# Altium PCB PCB2.PcbDoc
Units mil, origin at the board's own origin, x right, y up, seen from the top; angles counter-clockwise.
Board outline 6000 x 4000 mil, 2 copper layers (Top Layer, Bottom Layer); 55 components, 41 nets, 167 pads, 6 vias.
Unrouted connection lines stored in the file: 66.
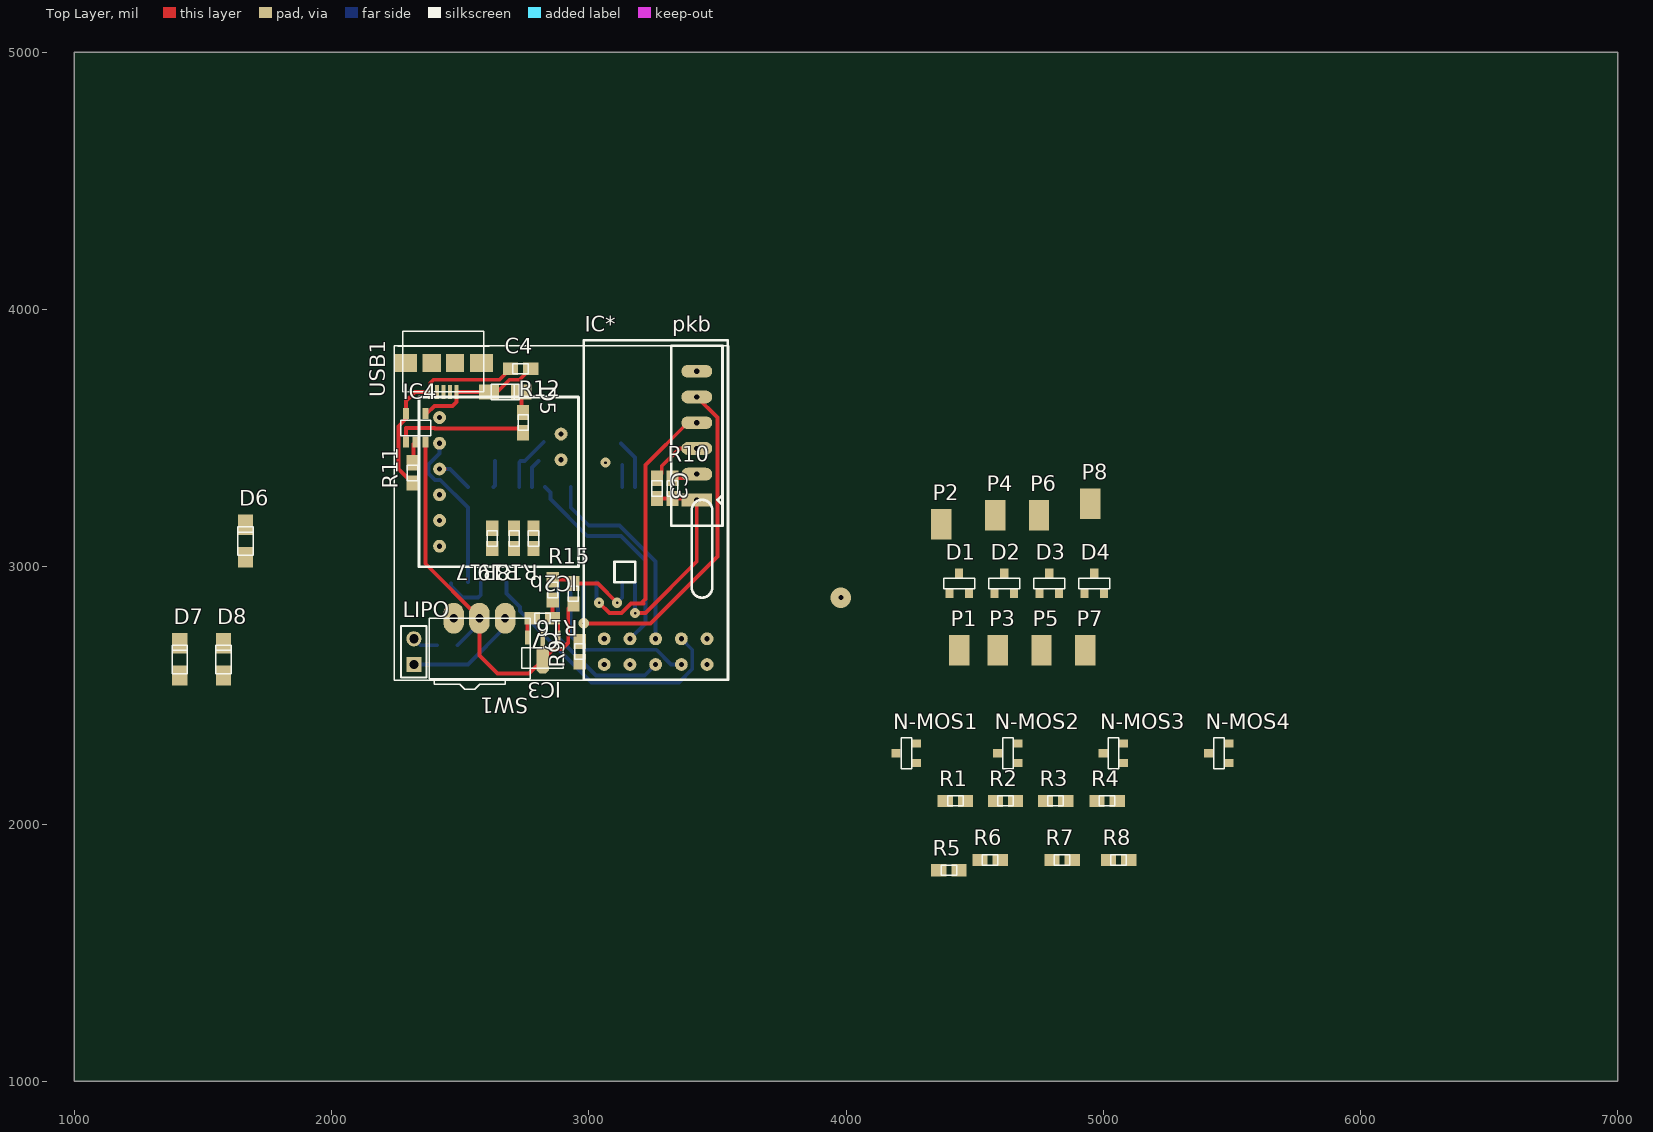
[diagram p0: Top Layer view]
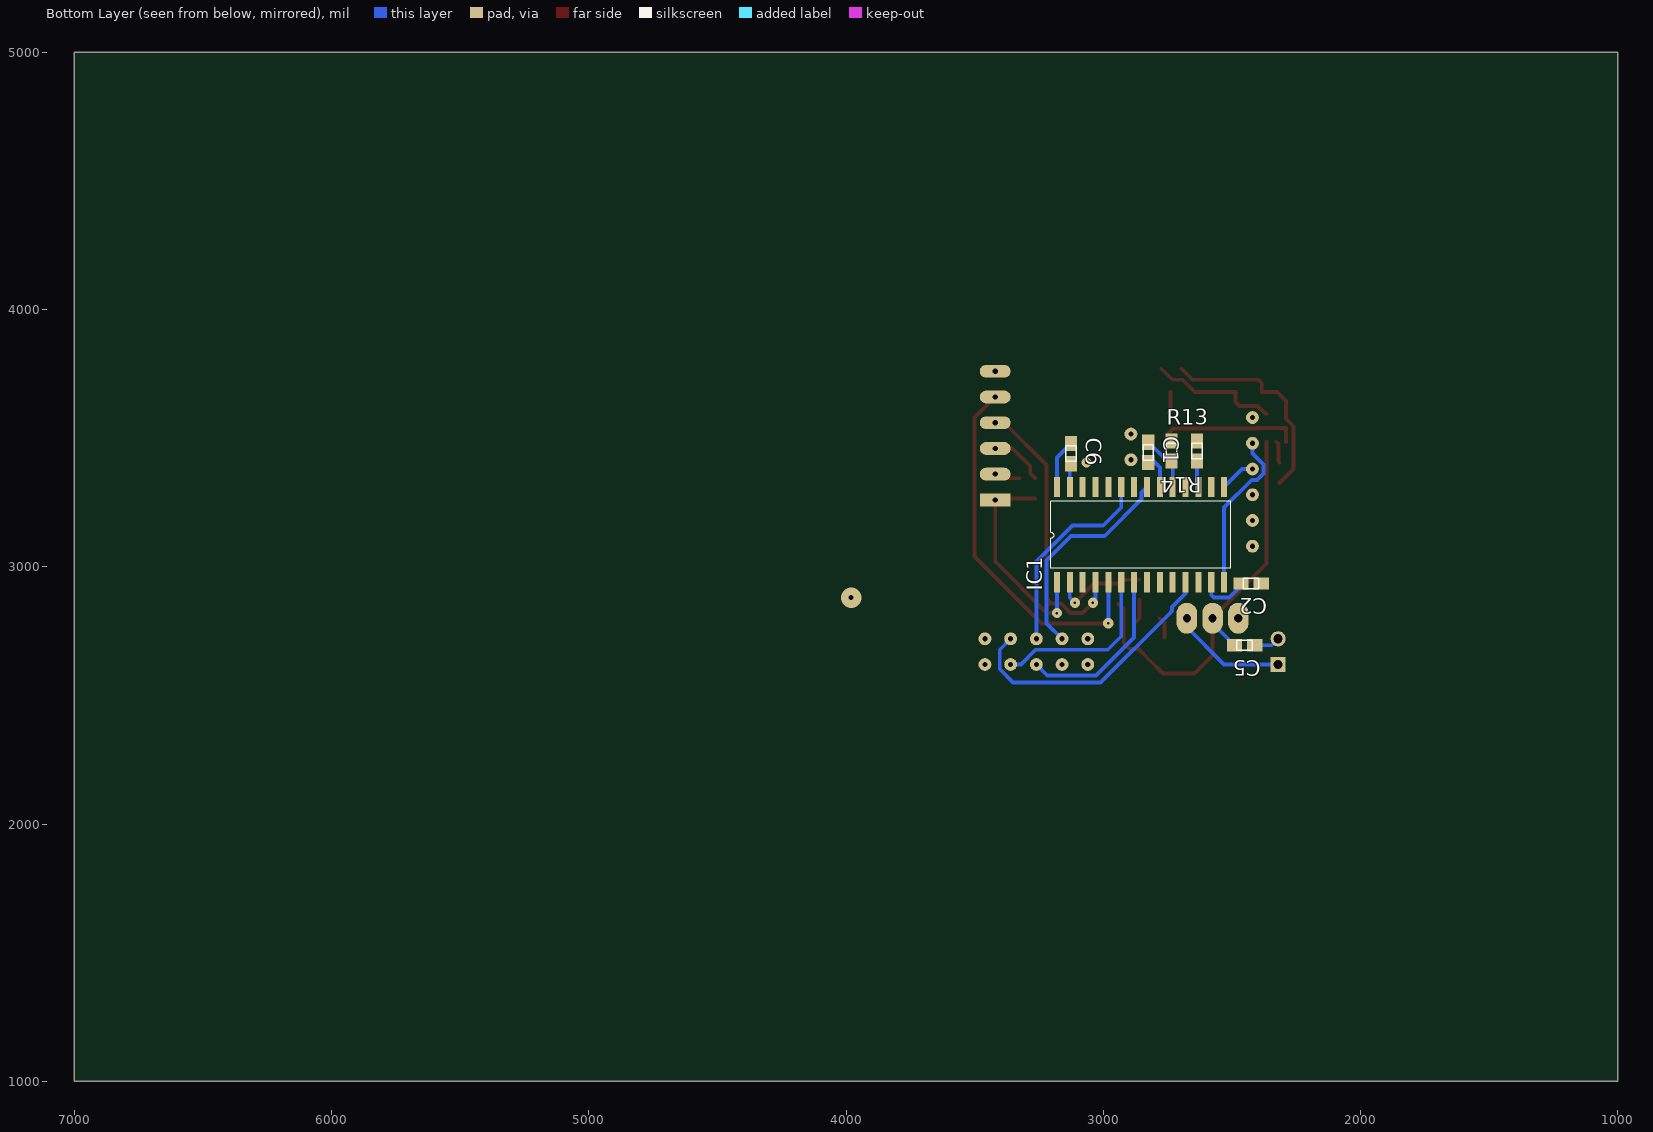
[diagram p1: Bottom Layer view, seen from below]

## Layer stack, top to bottom
Top Layer: signal copper 1.4
Dielectric: dielectric 12.6, FR-4, Dk 4.8
Bottom Layer: signal copper 1.4

## Board outline
1000,1000 7000,1000 7000,5000 1000,5000

## Design rules (kind name [scope] priority, off if disabled: settings)
Clearance [All] p1: gap=10
ComponentClearance [All] p1 off: gap=10 collisioncheckmode=3 verticalgap=10 showdistances=FALSE
PolygonConnect [All] p1: connectstyle=Relief reliefconductorwidth=10 reliefentries=4 polygonreliefangle="90 Angle"
RoutingVias [All] p1: holewidth=10 width=40 viastyle="Through Hole" minholewidth=10 minwidth=40 maxholewidth=10 maxwidth=40
SilkscreenOverComponentPads [All] p1: minsilkscreentomaskgap=10
SolderMaskExpansion [All] p1: expansion=4
Width [All] p1: maxlimit=15 minlimit=15 preferedwidth=15
26 further rules are at their usual default settings.

## Components (designator, comment, footprint, x,y, rotation, side; value= is the part's Value field where it differs from the comment)
C1 "TANTALE 10uf" cms805 2825,3445 r270 bottom
C2 "0.1uf ceramique" cms805 2425,2935 r0 bottom
C3 "1uf" cms805 3265,3305 r270 top
C4 "4.7uF" cms805 2735,3770 r0 top
C5 "4.7uF" cms805 2450,2695 r0 bottom
C6 "0.1uf ceramique" cms805 3125,3440 r270 bottom
C7 "1uF" cms805 2820,2800 r180 top
D1 "BAT54" SOT23 4440,2975 r0 top
D2 "BAT54" SOT23 4615,2975 r0 top
D3 "BAT54" SOT23 4790,2975 r0 top
D4 "BAT54" SOT23 4965,2975 r0 top
D5 "LED" cms1206 2675,3680 r0 top
D6 "LED" cms1206 1665,3100 r90 top
D7 "LED" cms1206 1410,2640 r90 top
D8 "LED" cms1206 1580,2640 r90 top
IC1 "dsPIC33FJ128MC802" SOIC28(300mil) 3180,2940 r90 bottom
IC2b "MPU6050" MPU6050_drotek 2420,3080 r180 top
IC3 "MCP1700" SOT89 2880,2725 r180 top
IC4 "MCP73831" SOT23-5 2330,3525 r0 top
IC* "NRF24L01" NRF24L01 3060,2620 r90 top
LIPO "Header 2" HDR1X2 2320,2620 r90 top
N-MOS1 "FD339" SOT23 4195,2275 r90 top
N-MOS2 "FD339" SOT23 4590,2275 r90 top
N-MOS3 "FD339" SOT23 5000,2275 r90 top
N-MOS4 "FD339" SOT23 5410,2275 r90 top
P1 "pad_moteur" PAD 4440,2675 r0 top
P2 "pad_moteur" PAD 4370,3165 r0 top
P3 "pad_moteur" PAD 4590,2675 r0 top
P4 "pad_moteur" PAD 4580,3200 r0 top
P5 "pad_moteur" PAD 4760,2675 r0 top
P6 "pad_moteur" PAD 4750,3200 r0 top
P7 "pad_moteur" PAD 4930,2675 r0 top
P8 "pad_moteur" PAD 4950,3245 r0 top
pkb "pickit3" pickit3 3420,3260 r90 top
R1 "10k" cms805 4425,2090 r0 top
R2 "10k" cms805 4620,2090 r0 top
R3 "10k" cms805 4815,2090 r0 top
R4 "10k" cms805 5015,2090 r0 top
R5 "330" cms805 4400,1820 r0 top
R6 "330" cms805 4560,1860 r0 top
R7 "330" cms805 4840,1860 r0 top
R8 "330" cms805 5060,1860 r0 top
R9 "10k" cms805 2965,2670 r90 top
R10 "10k" cms805 3325,3305 r90 top
R11 "4.7k" cms805 2315,3365 r90 top
R12 "150" cms805 2745,3560 r90 top
R13 "10k" cms805 2735,3450 r90 bottom
R14 "330" cms805 2635,3450 r270 bottom
R15 "17.25k" cms805 2860,2910 r90 top
R16 "4.7k" cms805 2940,2895 r270 top
R17 "65 + test" cms805 2625,3110 r270 top
R18 "65 + test" cms805 2785,3110 r270 top
R19 "65 + test" cms805 2710,3110 r270 top
SW1 "" inverseur 2675,2800 r180 top
USB1 "USB" USB_con 2435,3680 r180 top

## Footprints (in the part's own frame and the unit in brackets; to place one, negate y for a bottom-side part, rotate by r counter-clockwise, add the part's x,y. Pads: shape width x height; smd on the part's side, far side on the other; paste and mask are expansions set on the pad)
cms805 [mm]
  rect 1.5x1.2 smd: 1(-1,0) 2(1,0)
  silkscreen extent -0.76,-0.51 0.76,0.51
cms1206 [mm]
  rect 2x1.5 smd: 1(-1.6,0) 2(1.6,0)
  silkscreen extent -1.4,-0.76 1.4,0.76
HDR1X2 [mm] "Connector; Header; 2 Position"
  rect 1.5x1.5 hole 0.9: 1(0,0)
  round 1.5 hole 0.9: 2(2.54,0)
  silkscreen extent -1.27,-1.27 3.81,1.27
inverseur [mil]
  oval 80x120 hole 31.5: 1(0,0) 2(100,0) 3(200,0)
  silkscreen extent -98,0 295,276
MPU6050_drotek [mil]
  round 50 hole 20: 1(0,0) 2(0,-100) 3(0,-200) 4(0,-300) 5(0,-400) 6(0,-500) 7(-472.44,-335.83) 8(-472.44,-435.83)
  silkscreen extent -540,-580 80,80
NRF24L01 [mil]
  round 50 hole 20: 1(0,0) 2(0,-100) 3(0,-200) 4(0,-300) 5(0,-400) 6(100,-400) 7(100,-300) 8(100,-200) 9(100,-100) 10(100,0)
  silkscreen extent -60,-480 1260,80
PAD [mm]
  rect 2x3 smd: 1(0,0)
pickit3 [mil]
  rect 50x120 hole 20: 1(0,0)
  oval 50x120 hole 20: 2(100,0) 3(200,0) 4(300,0) 5(400,0) 6(500,0)
  silkscreen extent -100,-100 600,100
SOIC28(300mil) [mm]
  rect 2x0.6 smd: 1(0,0) 2(0,-1.27) 3(0,-2.54) 4(0,-3.81) 5(0,-5.08) 6(0,-6.35) 7(0,-7.62) 8(0,-8.89) 9(0,-10.16) 10(0,-11.43) 11(0,-12.7) 12(0,-13.97) 13(0,-15.24) 14(0,-16.51) 15(9.4,-16.51) 16(9.4,-15.24) 17(9.4,-13.97) 18(9.4,-12.7) 19(9.4,-11.43) 20(9.4,-10.16) 21(9.4,-8.89) 22(9.4,-7.62) 23(9.4,-6.35) 24(9.4,-5.08) 25(9.4,-3.81) 26(9.4,-2.54) 27(9.4,-1.27) 28(9.4,0)
  silkscreen extent 1.38,-17.14 8,0.63
SOT23 [mm]
  rect 0.8x0.9 smd: 1(-0.95,-2) 2(0,0) 3(0.95,-2)
  silkscreen extent -1.52,-1.52 1.52,-0.51
SOT23-5 [mm]
  rect 0.6x1.1 smd: 1(-1.016,-1.016) 2(-0.066,-1.016) 3(0.884,-1.016) 4(0.884,1.784) 5(-1.016,1.784)
  silkscreen extent -1.52,-0.38 1.4,1.14
SOT89 [mm]
  rect 0.48x1.4 smd: 1(0,0) 3(3,0)
  oct 1.2x2.7 smd: 2(1.5,2.2)
  rect 0.48x2 smd: 2(1.5,0.3)
  silkscreen extent -0.51,1.02 3.56,3.05
USB_con [mm]
  rect 2.3x1.8 smd: 0(-3.75,-2.85) 0(3.75,-2.85)
  rect 1.8x1.8 smd: 0(-1.15,-2.85) 0(1.15,-2.85)
  rect 0.4x1.4 smd: 1(-1.3,0) 2(-0.65,0) 3(0,0) 4(0.65,0) 5(1.3,0)
  silkscreen extent -4.5,-6 4.5,0

## Part data
C1 C2 C3 C4 C5 C6 C7: library part Capa
D1 D2 D3 D4: library part "Schottky BAT54"
IC2b: library part MPU6050-drotek
IC4: library part "MCP73831 Li-Po"
LIPO: "Header, 2-Pin"
N-MOS1 N-MOS2 N-MOS3 N-MOS4: library part "N-MOS FD339"
R1 R2 R3 R4 R5 R6 R7 R8 R9 R10 R11 R12 R13 R14 R15 R16 R17 R18 R19: library part Resistance
SW1: library part switch

## Via types
v1: diameter 40, hole 10, Top Layer to Bottom Layer, 5 vias
v2: diameter 80, hole 20, Top Layer to Bottom Layer, 1 vias

## Nets (pads, with @x,y where several pads share a name; then routed paths per layer and width w, separated by ;. In a path a pad name is that pad's centre, name@x,y a point inside that pad or via, vN(x,y) a via of type N, cw(c..) or ccw(c..) an arc to the next point about the centre after c; other vN are vias at no path point)
GND: C1.1 C2.1 C3.1 C4.1 C5.1 C6.2 C7.1 D6.2 D7.2 D8.2 IC1.8 IC1.19 IC1.27 IC2b.2 IC3.1 IC4.5 IC*.5 IC*.6 LIPO.2 N-MOS1.3 N-MOS2.3 N-MOS3.3 N-MOS4.3 pkb.3 R1.1 R2.1 R3.1 R4.1 R11.1 R13.1 R15.1 USB1.5 | length 1615.2
  Top Layer w15: R11.1 2260.69,3379.94 2260.69,3546.04 2290,3575.36 IC4.5 2290,3645 2325,3680 USB1.5 2384.04,3680.22 2384.04,3714.81 2396.26,3727.03 2652.66,3727.03 C4.1 ; R15.1 2859.37,2870 C7.1 2880,2779.37 IC3.1 ; C3.1 3283.88,3363.25 3283.88,3391.4 3352.48,3460 pkb.3
  Bottom Layer w15: LIPO.2 2345,2695 C5.1 ; IC1.19 2730,3405.63 R13.1 2751.26,3410.63 C1.1 ; IC1.27 C6.2@3130,3395.63
NET1: IC1.6 IC*.4 | length 700.6
  Bottom Layer w15: IC1.6 2930,2730 2982.5,2677.5 3262.6,2677.5 3320.1,2620 IC*.4 IC*.4@3360,2635
NET2: IC1.7 IC*.3 | length 673.7
  Bottom Layer w15: IC1.7 2880,2725 3027.5,2577.5 3217.5,2577.5 IC*.3
NET3: IC1.21 IC*.9 | length 852.9
  Bottom Layer w15: IC1.21 2850.69,3289.39 2850.69,3263.46 2994.15,3120 3124.64,3120 3220,3024.64 3220,2780 IC*.9
NET4: IC1.23 IC*.8 | length 797.1
  Bottom Layer w15: IC1.23 2930,3230 3000,3160 3120,3160 3260,3020 IC*.8
NetC1_2: C1.2 IC1.20 | length 110.9
  Bottom Layer w15: IC1.20 2780,3385.63 C1.2@2805,3410.63
NetC3_2: C3.2 IC1.1 pkb.1 R10.1 | length 835.2
  Top Layer w15: v1@3185,2820 3220,2820 3420,3020 pkb.1 3414.37,3265.63 R10.1 C3.2
  Bottom Layer w15: v1(3180,2820) IC1.1
NetD1_1: D1.1 N-MOS1.2 P1.1
NetD2_1: D2.1 N-MOS2.2 P3.1
NetD3_1: D3.1 N-MOS3.2 P5.1
NetD4_1: D4.1 N-MOS4.2 P7.1
NetD5_2: D5.2 R12.2 | length 83.5
  Top Layer w15: D5.2 2737.99,3606.38 R12.2
NetD6_1: D6.1 R17.1
NetD7_1: D7.1 R18.1
NetD8_1: D8.1 R19.1
NetIC1_2: IC1.2 R15.2 R16.1 | length 375.3
  Top Layer w15: R15.2 2925,2949.37 R16.1 3035.63,2934.37 v1(3110,2860)
  Bottom Layer w15: v1(3110,2860) 3130,2880 IC1.2
NetIC1_4: IC1.4 pkb.4 | length 1102.9
  Top Layer w15: v1(3040,2860) 3080,2820 3126.97,2820 3164.47,2857.5 3213.57,2857.5 3208.03,2863.03 3220,2875 3220,3395 3385,3560 pkb.4
  Bottom Layer w15: IC1.4 3030,2870 v1(3040,2860)
NetIC1_5: IC1.5 pkb.5 | length 1440.8
  Top Layer w15: v1(2980,2780) 3240,2780 3500,3040 3500,3580 pkb.5
  Bottom Layer w15: v1(2980,2780) IC1.5
NetIC1_9: IC1.9 R18.2
NetIC1_10: IC1.10 R19.2
NetIC1_11: IC1.11 IC*.7 | length 1077.4
  Bottom Layer w15: IC1.11 2680,2896.32 2732.5,2843.82 2732.5,2828.82 ; 2732.5,2827.5 2732.5,2828.82 ; IC*.7 3402.5,2677.5 3402.5,2602.4 3350.1,2550 3010,2550 2737.5,2822.5 2737.5,2823.82 2732.5,2828.82
NetIC1_12: IC1.12 R17.2
NetIC1_14: IC1.14 IC2b.5 | length 632.6
  Bottom Layer w15: IC2b.5 2420,3440.1 2377.5,3397.6 2377.5,3362.4 2402.4,3337.5 2422.6,3337.5 2530,3230.1 IC1.14
NetIC1_15: IC1.15 IC2b.4 | length 159
  Top Layer w15: IC2b.4 IC2b.4@2440,3380
  Bottom Layer w15: IC2b.4 2460.08,3380 IC1.15
NetIC1_16: IC1.16 IC2b.6
NetIC1_17: IC1.17 R14.2 | length 102.6
  Bottom Layer w15: IC1.17 2635,3315.08 R14.2
NetIC1_18: IC1.18 R8.1
NetIC1_22: IC1.22 R7.1
NetIC1_24: IC1.24 R6.1
NetIC1_26: IC1.26 R5.1
NetIC4_1: IC4.1 R12.1 | length 518
  Top Layer w15: IC4.1 2290,3540 2399.9,3540 2402.4,3537.5 2728.13,3537.5 R12.1
NetIC4_2: IC4.2 R11.2 | length 85.8
  Top Layer w15: R11.2 2319.31,3408.68 2319.31,3476.91 IC4.2
NetIC*_2: IC*.2 R9.1
NetLIPO_1: LIPO.1 SW1.1 | length 450.1
  Bottom Layer w15: LIPO.1 2530,2620 2675,2765 SW1.1
PWM1: N-MOS1.1 R1.2 R5.2
PWM2: N-MOS2.1 R2.2 R6.2
PWM3: N-MOS3.1 R3.2 R7.2
PWM4: N-MOS4.1 R4.2 R8.2
USB: C4.2 D5.1 IC4.4 R13.2 R14.1 USB1.1 | length 504.7
  Top Layer w15: IC4.4 2370.24,3595.24 2400,3625 2470,3625 2486.18,3641.18 USB1.1 D5.1 2644.35,3680 2691.37,3727.03 2731.4,3727.03 C4.2
VBAT: C5.2 D1.2 D2.2 D3.2 D4.2 IC3.2 IC4.3 P2.1 P4.1 P6.1 P8.1 R16.2 SW1.2 | length 1641.2
  Top Layer w15: IC4.3 2364.8,3011.51 2575,2801.32 SW1.2 2575,2655 2645,2585 2767.56,2585 2820.94,2638.39 2862.5,2679.94 2896.7,2679.94 2920,2703.24 2920,2835.63 R16.2
  Bottom Layer w15: C5.2 2575,2780.63 SW1.2
VCC: C2.2 C6.1 C7.2 IC1.13 IC1.28 IC2b.3 IC3.3 IC*.1 IC*.10 pkb.2 R9.2 R10.2 | length 574.4
  Top Layer w15: IC3.3 2761.89,2781.26 C7.2 ; R10.2 3404.37,3344.37 pkb.2
  Bottom Layer w15: C2.2 2464.37,2925.63 2510,2880 2570,2880 2580,2890 IC1.13 ; C6.1 3180,3424.37 IC1.28
pads on no net: D1.3 D2.3 D3.3 D4.3 IC1.3 IC1.25 IC2b.1 IC2b.7 IC2b.8 pkb.6 SW1.3 USB1.0 USB1.2 USB1.3 USB1.4
copper on no net:
  other v1: 3065,3405
  other v2: 3980,2880

## Silkscreen, mask and mechanical layers (free items; w line width, h text height)
Top Overlay:
  lines w5: 2244.09,2559.06 3543.31,2559.06 3543.31,3858.27 2244.09,3858.27 2244.09,2559.06